# EAGLE board ESP12E_2.54_adapter_minimal (EAGLE 8.3.1)
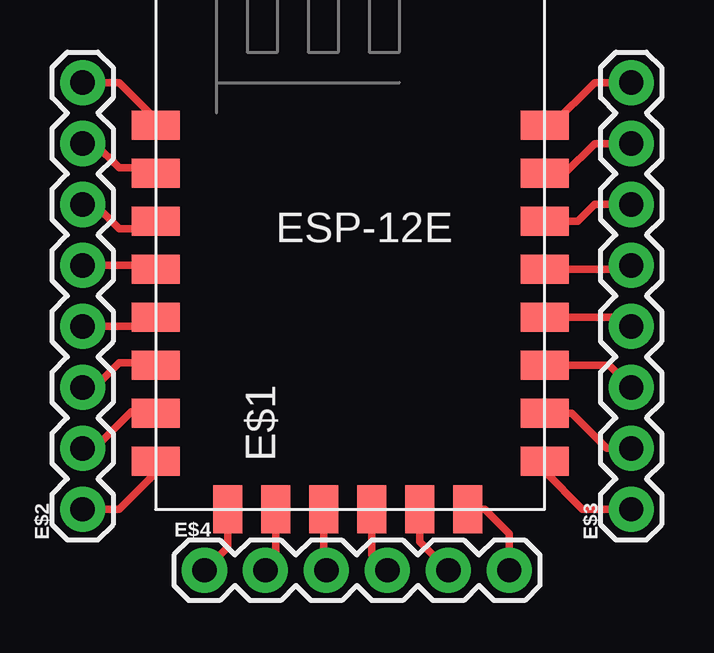
[diagram p0: board, top side]

No outline drawn. Coordinates in mm, seen from the top.
Copper layers (1*16): Top 0.035mm / dielectric 1.5mm / Bottom 0.035mm
Design rules "default": minimum track width 6mil, minimum drill 0.35mm, track to track 6mil, track to pad 6mil, pad to pad 6mil, via to via 6mil, smd to smd 6mil, copper to edge 40mil, drill to drill 6mil, minimum pad ring 10mil, minimum via ring 8mil, stop-mask expansion 4mil, vias tented up to drill 0mil, thermal gap 10mil

## Footprints (pad centres in the part's own frame; a part is rotated, then mirrored left to right if it is on the bottom)
ESP8266-ESP12E = smd 2 x 1.2: 1 -7.62,5.84; 2 -7.62,3.84; 3 -7.62,1.84; 4 -7.62,-0.16; 5 -7.62,-2.16; 6 -7.62,-4.16; 7 -7.62,-6.16; 8 -7.62,-8.16; 9 8.58,-8.16; 10 8.58,-6.16; 11 8.58,-4.16; 12 8.58,-2.16; 13 8.58,-0.16; 14 8.58,1.84; 15 8.58,3.84; 16 8.58,5.84 | smd 1.2 x 2: 17 -4.62,-10.16; 18 -2.62,-10.16; 19 -0.62,-10.16; 20 1.38,-10.16; 21 3.38,-10.16; 22 5.38,-10.16
1X08 = drill 1.016 pad 1.88: 1 0,0; 2 2.54,0; 3 5.08,0; 4 7.62,0; 5 10.16,0; 6 12.7,0; 7 15.24,0; 8 17.78,0
1X06 = drill 1.016 pad 1.88: 1 0,0; 2 2.54,0; 3 5.08,0; 4 7.62,0; 5 10.16,0; 6 12.7,0

## Placement (x,y rotation side)
E$1  [ESP8266-ESP12E]  12.19,13.72 0 top
E$2  [1X08]  1.52,3.56 90 top
E$3  [1X08]  24.38,3.56 90 top
E$4  [1X06]  6.6,1.02 0 top

## Library data of the parts
E$1 = ESP8266-ESP12E
E$2-E$4 = SparkFun-Connectors

## Nets
S$1: E$1.1 E$2.8
S$2: E$1.2 E$2.7
S$3: E$1.3 E$2.6
S$4: E$1.4 E$2.5
S$5: E$1.5 E$2.4
S$6: E$1.6 E$2.3
S$7: E$1.7 E$2.2
S$8: E$1.8 E$2.1
S$9: E$1.17 E$4.1
S$10: E$1.18 E$4.2
S$11: E$1.19 E$4.3
S$12: E$1.20 E$4.4
S$13: E$1.21 E$4.5
S$14: E$1.22 E$4.6
S$15: E$1.9 E$3.1
S$16: E$1.10 E$3.2
S$17: E$1.11 E$3.3
S$18: E$1.12 E$3.4
S$19: E$1.13 E$3.5
S$20: E$1.14 E$3.6
S$21: E$1.15 E$3.7
S$22: E$1.16 E$3.8

## Tracks (layer width: path | path; a pad name or v marks a point on that pad's centre or on a via)
S$1
  Top 0.305: E$1.1 4.57,19.81 3.05,21.34 E$2.8
S$2
  Top 0.305: E$2.7 2.03,18.8 3.05,17.78 4.35,17.78 E$1.2
S$3
  Top 0.305: E$2.6 2.03,16.26 3.05,15.24 4.26,15.24 E$1.3
S$4
  Top 0.305: E$2.5 4.41,13.72 E$1.4
S$5
  Top 0.305: E$2.4 4.19,11.18 E$1.5
S$6
  Top 0.305: E$2.3 2.03,8.64 3.05,9.65 4.48,9.65 E$1.6
S$7
  Top 0.305: E$2.2 2.03,6.1 3.56,7.62 4.51,7.62 E$1.7
S$8
  Top 0.305: E$1.8 4.57,5.08 3.05,3.56 E$2.1
S$9
  Top 0.305: E$1.17 7.57,1.98 E$4.1
S$10
  Top 0.305: E$1.18 9.57,1.44 E$4.2
S$11
  Top 0.305: E$1.19 11.57,1.13 E$4.3
S$12
  Top 0.305: E$1.20 13.57,1.67 E$4.4
S$13
  Top 0.305: E$1.21 15.57,2.21 E$4.5
S$14
  Top 0.305: E$1.22 18.29,3.56 19.3,2.54 E$4.6
S$15
  Top 0.305: E$1.9 20.77,5.14 22.35,3.56 E$3.1
S$16
  Top 0.305: E$1.10 21.91,7.56 23.37,6.1 E$3.2
S$17
  Top 0.305: E$1.11 23.46,9.56 E$3.3
S$18
  Top 0.305: E$1.12 24,11.56 E$3.4
S$19
  Top 0.305: E$1.13 24.22,13.56 E$3.5
S$20
  Top 0.305: E$1.14 22.16,15.56 22.86,16.26 E$3.6
S$21
  Top 0.305: E$1.15 21.62,17.56 22.86,18.8 E$3.7
S$22
  Top 0.305: E$1.16 21.08,19.56 22.86,21.34 E$3.8